# Allegro board jn516x_0v1.brd
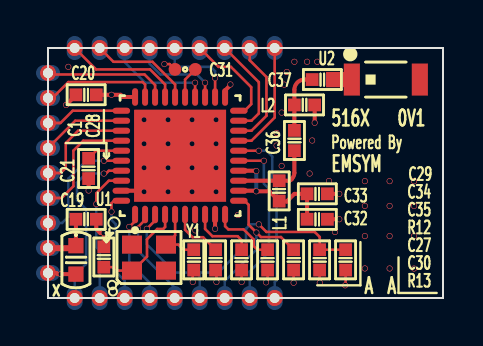
[diagram p0: board, top side]
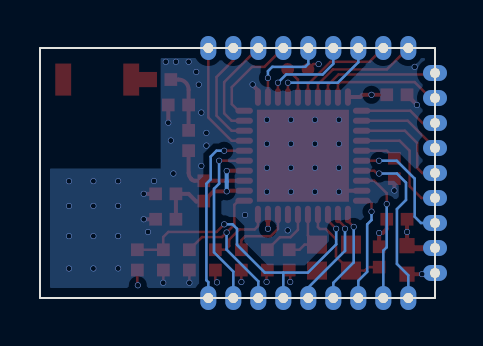
[diagram p1: board, bottom side, seen from below]

Outline 19.75 x 12.5 mm; copper layers: TOP, GND, VCC, BOTTOM. Coordinates in mm from the lower left corner of the outline.
Outline path: 0,12.5 0,0 19.75,0 19.75,12.5 0,12.5

## Design rules (mm)
constraint set DEFAULT: min track width 0.127, pair gap 0.127

## Placement (name value [footprint] x y rotation side)
C1  226  [C0603]  1.4 1.91 270 top
C19  104  [C0402]  1.91 3.94 0 top
C20  104  [C0402]  1.91 10.16 180 top
C21  104  [C0402]  2.03 6.48 90 top
C27  104  [C0402]  12.28 1.91 270 top
C28  103  [C0402]  2.79 2.05 90 top
C29  103  [C0402]  7.29 1.91 270 top
C30  474  [C0402]  13.58 1.91 270 top
C31  104  [C402_25]  6.86 11.43 0 top
C32  104  [C0402]  13.46 3.94 180 top
C33  470  [C0402]  13.46 5.21 180 top
C34  104  [C0402]  8.38 1.91 90 top
C35  104  [C0402]  9.68 1.91 90 top
C36  470  [C0402]  12.32 7.87 270 top
C37  470  [C0402]  12.83 9.65 0 top
J1  CON1  [HALF_DRILL_0R8_0R8]  7.58 0 0 top
J2  CON1  [HALF_DRILL_0R8_0R8]  10.08 0 0 top
J3  CON1  [HALF_DRILL_0R8_0R8]  8.83 0 0 top
J4  CON1  [HALF_DRILL_0R8_0R8]  3.83 12.5 0 top
J5  CON1  [HALF_DRILL_0R8_0R8]  5.08 12.5 0 top
J6  CON1  [HALF_DRILL_0R8_0R8]  6.33 0 0 top
J7  CON1  [HALF_DRILL_0R8_0R8]  5.08 0 0 top
J8  CON1  [HALF_DRILL_0R8_0R8]  3.83 0 0 top
J9  CON1  [HALF_DRILL_0R8_0R8]  2.58 0 0 top
J10  CON1  [HALF_DRILL_0R8_0R8]  1.33 0 0 top
J11  CON1  [HALF_DRILL_0R8_0R8]  0 3.75 90 top
J12  CON1  [HALF_DRILL_0R8_0R8]  0 5 90 top
J13  CON1  [HALF_DRILL_0R8_0R8]  0 6.25 90 top
J14  CON1  [HALF_DRILL_0R8_0R8]  0 7.5 90 top
J15  CON1  [HALF_DRILL_0R8_0R8]  0 8.75 90 top
J16  CON1  [HALF_DRILL_0R8_0R8]  0 10 90 top
J17  CON1  [HALF_DRILL_0R8_0R8]  0 11.25 90 top
J18  CON1  [HALF_DRILL_0R8_0R8]  1.33 12.5 0 top
J19  CON1  [HALF_DRILL_0R8_0R8]  2.58 12.5 0 top
J20  CON1  [HALF_DRILL_0R8_0R8]  8.83 12.5 0 top
J21  CON1  [HALF_DRILL_0R8_0R8]  10.08 12.5 0 top
J22  CON1  [HALF_DRILL_0R8_0R8]  11.33 12.5 0 top
J23  CON1  [HALF_DRILL_0R8_0R8]  11.33 0 0 top
J24  CON1  [HALF_DRILL_0R8_0R8]  7.58 12.5 0 top
J25  CON1  [HALF_DRILL_0R8_0R8]  6.33 12.5 0 top
J26  CON1  [HALF_DRILL_0R8_0R8]  0 2.5 90 top
J27  CON1  [HALF_DRILL_0R8_0R8]  0 1.25 90 top
L1  3.9nH  [L0402]  11.56 5.35 90 top
L2  5.1nH  [L0402]  13.72 10.92 180 top
R12  433  [R0402]  10.98 1.91 90 top
R13  183  [R0402]  14.88 1.91 90 top
U1  JN516X  [HVQFN40_6X6]  6.6 7.11 0 top
U2  RFANT3216120A5T  [ANT_3216-2PIN]  16.89 10.92 0 top
Y1  32MHz  [OSC_SMD_2520]  5.05 2.02 0 top

## Library data of the parts
C1 C19-C21 C27-C30 C32-C37 = CAP_NP
C31 = CAP_NP: Tolerance: TOLERANCE; User Part Number: USERPART#
J1-J27 = CON1
L1 L2 = L
R12 R13 = R2
U1 = JN516X
U2 = ANA-2PIN
Y1 = G_OSC_4PINpassive

## Footprints (pads in the part's own frame, mm; a bottom-side part is the same pattern mirrored in y, then rotated)
ANT_3216-2PIN
  rect 0.8x1.6 smd: 1(-1.7,0) 2(1.7,0)
C0402
  rect 0.635x0.635 smd: 1(-0.508,0) 2(0.508,0)
C402_25
  round 0.635 smd: 1(-0.508,0) 2(0.508,0)
C0603
  rect 0.762x0.762 smd: 1(-0.711,0) 2(0.711,0)
HALF_DRILL_0R8_0R8
  round 0.8 hole 0.5: 1(0,0)
HVQFN40_6X6
  oval 0.3x0.875 smd: 1(-2.25,-2.938) 2(-1.75,-2.938) 3(-1.25,-2.938) 4(-0.75,-2.938) 5(-0.25,-2.938) 6(0.25,-2.938) 7(0.75,-2.938) 8(1.25,-2.938) 9(1.75,-2.938) 10(2.25,-2.938) 21(2.25,2.938) 22(1.75,2.938) 23(1.25,2.938) 24(0.75,2.938) 25(0.25,2.938) 26(-0.25,2.938) 27(-0.75,2.938) 28(-1.25,2.938) 29(-1.75,2.938) 30(-2.25,2.938)
  oval 0.875x0.3 smd: 11(2.938,-2.25) 12(2.938,-1.75) 13(2.938,-1.25) 14(2.938,-0.75) 15(2.938,-0.25) 16(2.938,0.25) 17(2.938,0.75) 18(2.938,1.25) 19(2.938,1.75) 20(2.938,2.25) 31(-2.938,2.25) 32(-2.938,1.75) 33(-2.938,1.25) 34(-2.938,0.75) 35(-2.938,0.25) 36(-2.938,-0.25) 37(-2.938,-0.75) 38(-2.938,-1.25) 39(-2.938,-1.75) 40(-2.938,-2.25)
  rect 4.6x4.6 smd: 41(0,0)
L0402
  rect 0.635x0.635 smd: 1(-0.508,0) 2(0.508,0)
OSC_SMD_2520
  rect 1x0.9 smd: 1(-0.85,-0.65) 2(0.85,-0.65) 3(0.85,0.65) 4(-0.85,0.65)
R0402
  rect 0.635x0.635 smd: 1(-0.508,0) 2(0.508,0)

## Nets
GND: C1.2 C19.2 C20.2 C21.1 C27.2 C28.2 C29.2 C30.2 C31.1 C32.1 C33.1 C34.1 C35.1 C37.2 J27.1 R12.1 U1.21 U1.39 U1.41
VCC_3V3: C1.1 C19.1 C20.1 J26.1 R13.1 U1.9 U1.30
RESET: C30.1 J1.1 R13.2 U1.3
VB_RF: C32.2 C33.2 L1.1 U1.12 U1.14
VREF: C27.1 J3.1 U1.11
N16770935: J2.1 U1.15
N16770957: J4.1 U1.24
N16770977: J5.1 U1.23
N16770981: J6.1 U1.2
N16771025: J7.1 U1.1
N16771029: J8.1 U1.40
N16771033: J9.1 U1.38
N16771037: J10.1 U1.37
N16771041: J11.1 U1.36
N16771045: J12.1 U1.34
N16771097: J13.1 U1.33
N16771101: J14.1 U1.32
N16771105: J15.1 U1.31
N16771109: J16.1 U1.29
N16771113: J17.1 U1.28
N16771117: J18.1 U1.27
N16771169: J19.1 U1.26
N16771173: J20.1 U1.19
N16771177: J21.1 U1.18
N16771181: J22.1 U1.17
N16771185: J23.1 U1.16
N16771189: J24.1 U1.20
N16771253: J25.1 U1.22
N16771332: C35.2 U1.8
N16771518: C21.2 U1.35
N16771899: R12.2 U1.10
N16772356: C28.1 U1.4(XTAL_OUT) Y1.1
N16772365: C29.1 U1.5 Y1.3
N16774038: C34.2 U1.6
N16774061: C31.2 U1.25
N16775877: C36.2 L1.2 U1.13
N16775955: C36.1 C37.1 L2.2
N16775963: L2.1 U2.1(RF_IN)

Pads without a net: U1 7; U2 2; Y1 2 4

## Via types
v1: diameter 0.3, hole 0.254, TOP to BOTTOM, 79 vias

## Routing (per net, layer and track width the routed paths; a pad name or vN(x,y) marks a point on that pad's centre or on a via; arc(x,y) is an arc through that point)
GND: length 12.8
  TOP w0.127: C34.1 8.42,1.36 v1(8.42,0.8) ; v1(13.59,0.76) 13.58,0.77 C30.2 ; v1(5.82,11.7) 6.08,11.7 C31.1 ; C29.2 7.24,1.4 v1(7.24,0.8) ; C27.2 v1(12.28,0.76) ; R12.1 10.98,0.86 v1(10.9,0.78) ; C35.1 v1(9.68,0.8)
  TOP w0.2: J27.1 0.42,1.25 0.48,1.19 v1(0.65,1.19) C1.2 ; C37.2 v1(13.34,8.76) ; U1.21 8.85,10.38 9.12,10.64 v1(9.12,10.68) ; C33.1 v1(14.56,5.21) ; C21.1 v1(2.03,5.37) ; v1(4.8,5.31) 4.43,5.31 4.38,5.36 U1.39 ; C28.2 v1(2.79,3.25) 2.61,3.25 2.41,3.45 2.41,3.94 ; v1(0.91,9.65) 1.38,10.13 arc(1.39,10.14) C20.2 ; C32.1 v1(14.56,3.94)
  vias: v1(1.02,11.56) v1(4.8,8.91) v1(4.8,7.71) v1(4.8,6.51) v1(6,8.91) v1(6,7.71) v1(6,6.51) v1(6,5.31) v1(7.2,8.91) v1(7.2,7.71) v1(7.2,6.51) v1(7.2,5.31) v1(7.37,3.38) v1(8.4,8.91) v1(8.4,7.71) v1(8.4,6.51) v1(8.4,5.31) v1(9.5,4.15) v1(11.43,8.26) v1(11.43,7.62) v1(11.68,9.27) v1(11.68,6.6) v1(11.81,10.67) v1(11.94,11.3) v1(12.32,11.81) v1(12.95,11.81) v1(13.08,6.22) v1(13.21,7.87) v1(13.46,11.81) v1(14.05,5.85) v1(14.35,3.3) v1(15.84,5.84) v1(15.84,4.6) v1(15.84,3.1) v1(15.84,1.48) v1(17.08,5.84) v1(17.08,4.6) v1(17.08,3.1) v1(17.08,1.48) v1(18.3,5.84) v1(18.3,4.6) v1(18.3,3.09) v1(18.3,1.47)
VCC_3V3: length 6.4
  TOP w0.127: v1(14.86,0.64) 14.88,0.66 R13.1 ; 3.63,10.16 3.65,10.16 3.76,10.05
  TOP w0.2: C19.1 v1(1.4,3.3) C1.1 ; U1.9 v1(8.35,3.46) ; U1.30 3.74,10.05 3.63,10.16 v1(3.17,10.16) 2.41,10.16
  TOP w0.3: C1.1 1.27,2.49 0.01,2.49 J26.1
RESET: length 15.8
  TOP w0.127: 14.88,2.41 13.58,2.41 13.59,2.42 13.59,3.05 13.34,3.3 10.92,3.3 v1(10.54,3.68) ; U1.3 5.35,3.87 v1(4.94,3.46)
  BOTTOM w0.127: 7.58,1.27 6.35,1.27 4.94,2.68 v1(4.94,3.46) ; 7.58,1.27 8.51,1.27 9.9,2.66 9.9,3.46 10.12,3.68 v1(10.54,3.68) ; 7.58,1.27 J1.1
VB_RF: length 7
  TOP w0.2: v1(10.42,6.35) 10.34,6.35 10.33,6.36 U1.14 ; U1.12 10.39,5.36 v1(10.41,5.33) 11.07,5.33 L1.1 11.58,4.83 11.94,4.83 12.32,5.21 C33.2 C32.2
  BOTTOM w0.2: v1(10.41,5.33) 10.41,5.82 10.42,5.82 v1(10.42,6.35)
VREF: length 8.3
  TOP w0.127: 12.28,2.41 11.65,3.05 10.65,3.05 v1(10.42,3.27) 10.03,3.66 10.03,4.66 9.83,4.86 U1.11
  BOTTOM w0.127: J3.1 8.83,0.83 10.42,2.42 v1(10.42,3.27)
N16770935: length 8.6
  TOP w0.127: U1.15 v1(10.79,6.86)
  BOTTOM w0.127: J2.1 10.08,1.32 11.05,2.29 11.05,5.46 10.79,5.71 v1(10.79,6.86)
N16770957: length 5.4
  TOP w0.127: U1.24 v1(7.35,10.76)
  BOTTOM w0.127: J4.1 3.83,11.79 4.86,10.76 v1(7.35,10.76)
N16770977: length 4.7
  TOP w0.127: U1.23 v1(7.85,10.76)
  BOTTOM w0.127: J5.1 5.08,11.71 5.62,11.18 7.44,11.18 v1(7.85,10.76)
N16770981: length 5.1
  TOP w0.127: U1.2 4.85,3.91 4.5,3.55 v1(4.5,3.46)
  BOTTOM w0.127: v1(4.5,3.46) 4.5,2.36 6.33,0.52 J6.1
N16771025: length 4.7
  TOP w0.127: U1.1 4.35,3.85 v1(4.06,3.56)
  BOTTOM w0.127: v1(4.06,3.56) 4.06,1.78 5.08,0.76 J7.1
N16771029: length 5.6
  TOP w0.127: v1(3.17,4.32) 3.17,4.74 3.3,4.86 U1.40
  BOTTOM w0.127: J8.1 3.83,0.86 3.39,1.31 3.39,3.68 3.17,3.9 v1(3.17,4.32)
N16771033: length 6.8
  TOP w0.127: v1(2.41,4.7) 2.41,5.24 3.04,5.86 U1.38
  BOTTOM w0.127: v1(2.41,4.7) 2.41,2.54 2.58,2.37 J9.1
N16771037: length 8.7
  TOP w0.127: v1(2.79,6.22) 2.9,6.22 3.04,6.36 U1.37
  BOTTOM w0.127: J10.1 1.33,1.13 1.91,1.71 1.91,4.45 1.45,4.9 1.45,5.77 1.91,6.22 v1(2.79,6.22)
N16771041: length 6.1
  TOP w0.127: U1.36 v1(2.8,6.86)
  BOTTOM w0.127: J11.1 0.7,3.75 1.02,4.06 1.02,5.97 1.91,6.86 v1(2.8,6.86)
N16771045: length 5.9
  TOP w0.127: J12.1 0.68,5 1.27,5.59 1.27,7.37 1.77,7.86 U1.34
N16771097: length 5.3
  TOP w0.127: U1.33 1.5,8.36 0.89,7.75 0.89,6.5 0.64,6.25 J13.1
N16771101: length 4.2
  TOP w0.127: J14.1 1.36,8.86 U1.32
N16771105: length 3.9
  TOP w0.127: U1.31 1.23,9.36 0.62,8.75 J15.1
N16771109: length 5.9
  TOP w0.127: U1.29 4.85,10.68 4.74,10.79 1.02,10.79 0.22,10 J16.1
N16771113: length 6.2
  TOP w0.127: J17.1 0.07,11.18 4.83,11.18 5.35,10.65 U1.28
N16771117: length 5.9
  TOP w0.127: U1.27 5.85,10.68 5.1,11.43 2.4,11.43 J18.1
N16771169: length 5.2
  TOP w0.127: U1.26 6.35,10.68 5.22,11.81 3.27,11.81 J19.1
N16771173: length 5.1
  TOP w0.127: J20.1 10.54,10.79 10.54,9.23 10.17,8.86 U1.19
N16771177: length 5.5
  TOP w0.127: 10.08,12.59 J21.1 10.08,11.89 10.92,11.05 10.92,9.11 10.17,8.36 U1.18
N16771181: length 5.8
  TOP w0.127: U1.17 10.17,7.86 11.33,9.03 J22.1 11.33,12.59
N16771185: length 9
  TOP w0.127: U1.16 v1(10.54,7.36)
  BOTTOM w0.127: v1(10.54,7.36) 10.93,7.36 11.22,7.07 11.22,5.93 11.43,5.71 11.43,0.89 11.33,0.79 J23.1
N16771189: length 5
  TOP w0.127: J24.1 8.53,11.56 9.14,11.56 10.16,10.54 10.16,9.69 9.83,9.36 U1.20
N16771253: length 4.3
  TOP w0.127: v1(8.35,11) U1.22
  BOTTOM w0.127: v1(8.35,11) 8.35,11.34 8.14,11.56 6.49,11.56 6.33,11.71 J25.1
N16771332: length 3.3
  TOP w0.127: 9.68,2.41 9.68,2.89 9.48,3.09 8.22,3.09 7.85,3.45 U1.8
N16771518: length 1.8
  TOP w0.127: U1.35 2.41,7.36 C21.2
N16771899: length 3.4
  TOP w0.127: U1.10 8.85,3.59 9.02,3.43 9.78,3.43 10.29,2.92 10.29,2.6 10.47,2.41 10.98,2.41
N16772356: length 5.2
  TOP w0.127: C28.1 3.34,1.54 3.51,1.37 Y1.1 4.25,1.37 4.95,2.07 4.95,2.94 5.46,3.45 5.76,3.45 5.85,3.55 U1.4
N16772365: length 3.2
  TOP w0.127: 7.29,2.41 6.78,2.41 6.52,2.67 Y1.3 6.35,3.12 U1.5
N16774038: length 2.7
  TOP w0.127: 8.38,2.41 7.75,3.04 7.22,3.04 6.85,3.41 U1.6
N16774061: length 1.6
  TOP w0.127: U1.25 6.85,10.92 C31.2
N16775877: length 4.1
  TOP w0.2: C36.2 12.32,6.26 arc(12.29,6.1) 12.2,5.96 12.2,5.96 12.16,5.92 arc(12.1,5.88) 12.02,5.86 L1.2 U1.13
N16775955: length 3.2
  TOP w0.2: L2.2 12.83,10.92 arc(12.47,10.77) 12.32,10.41 C36.1

## Copper pours and planes (outline as drawn; the poured copper is in the pictures)
GND on BOTTOM: 13.72,12 0.5,12 0.5,0.5 19.25,0.5 19.25,6.48 13.72,6.48
VCC_3V3 on VCC: 1.38,0.38 0.67,0.67 0.38,1.38 0.38,11.19 0.67,11.9 1.38,12.19 12.46,12.19 13.17,11.9 13.46,11.19 13.46,6.48 18.8,6.48 18.92,6.35 18.92,1.02 18.54,0.64 13.13,0.64 12.82,0.45 12.46,0.38
N16775963 on TOP (solid shape): 15.49,10.54 13.9,10.54 13.9,11.3 15.49,11.3
GND on GND: 1.13,0.13 0.42,0.42 0.13,1.13 0.13,11.45 0.42,12.15 1.13,12.45 12.72,12.45 13.42,12.15 13.72,11.45 13.72,6.48 18.56,6.48 19.27,6.18 19.56,5.48 19.56,1.13 19.27,0.42 18.56,0.13 13.06,0.13 12.98,0.13 12.89,0.14 12.8,0.13 12.72,0.13 ; 2 cut-outs

Small or netless copper shapes (teardrops, artwork), in the pictures only: 1 on GND, 1 on VCC

## Text on the board
Ref Des/Silkscreen Top: Powered By | x | 516X | EMSYM | A | 0V1
User.6: FIGURE | FINISHED_SIZE | 0.254 | 0.5 | DRILL CHART: TOP to BOTTOM | ALL UNITS ARE IN MILLIMETERS | PLATED | QTY | 77 | 27
